# Altium PCB MB1642.PcbDoc
Units mm, origin at the board's own origin, x right, y up, seen from the top; angles counter-clockwise.
Board outline 70.36 x 75.18 mm, 2 copper layers (Top Layer, Bottom Layer), stack 1.57 mm thick; 25 components, 22 nets, 229 pads, 124 vias.
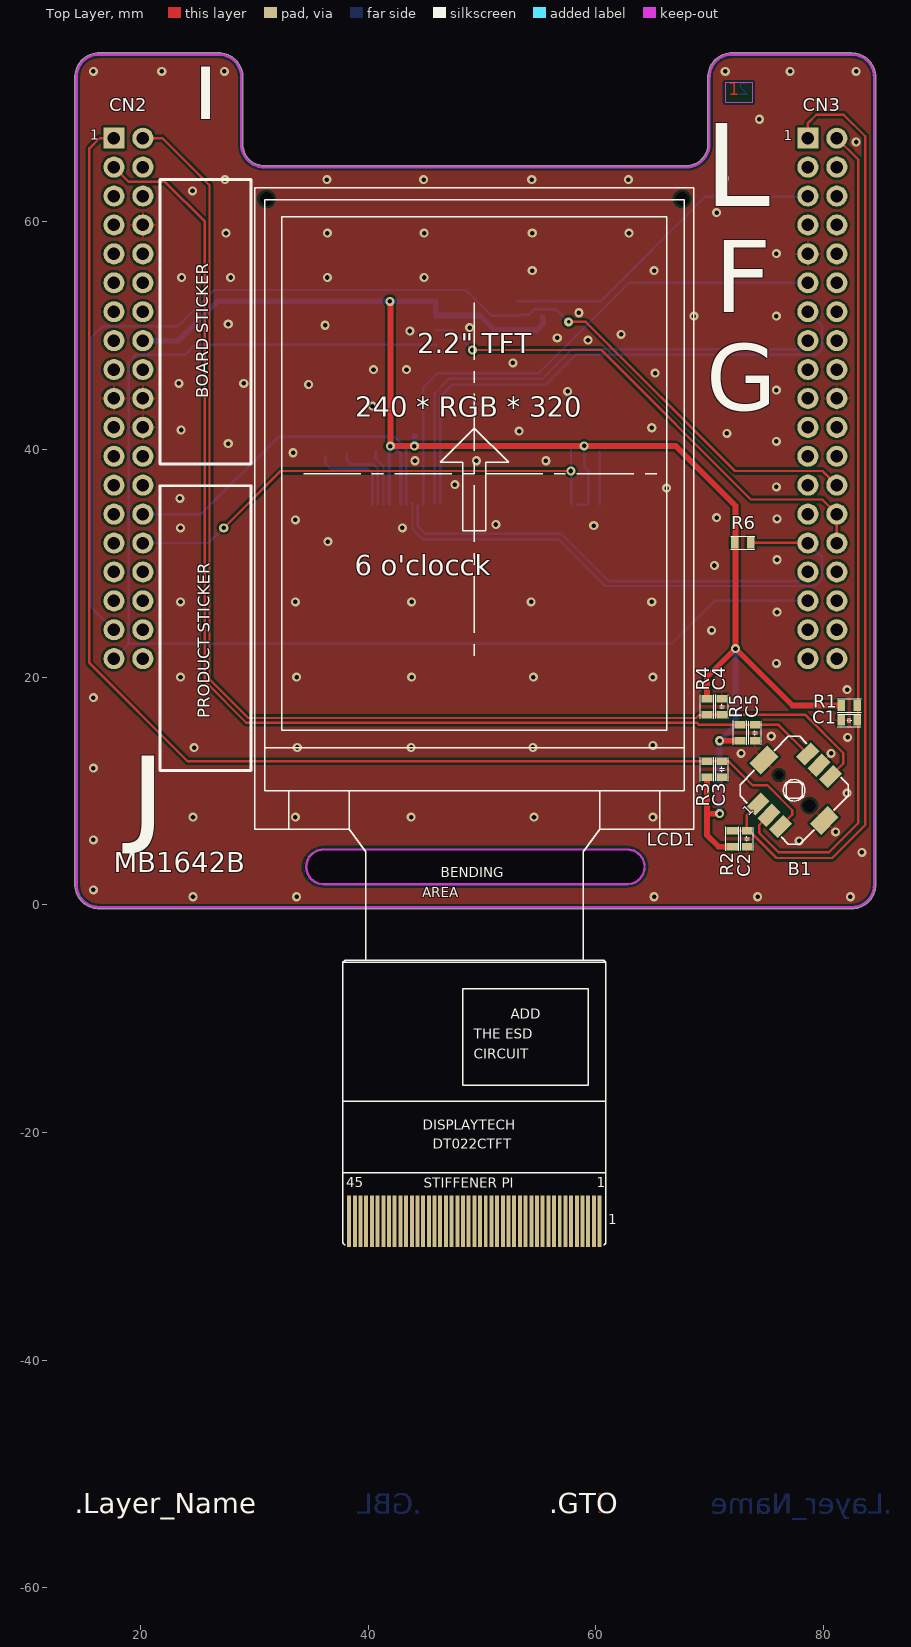
[diagram p0: Top Layer view]
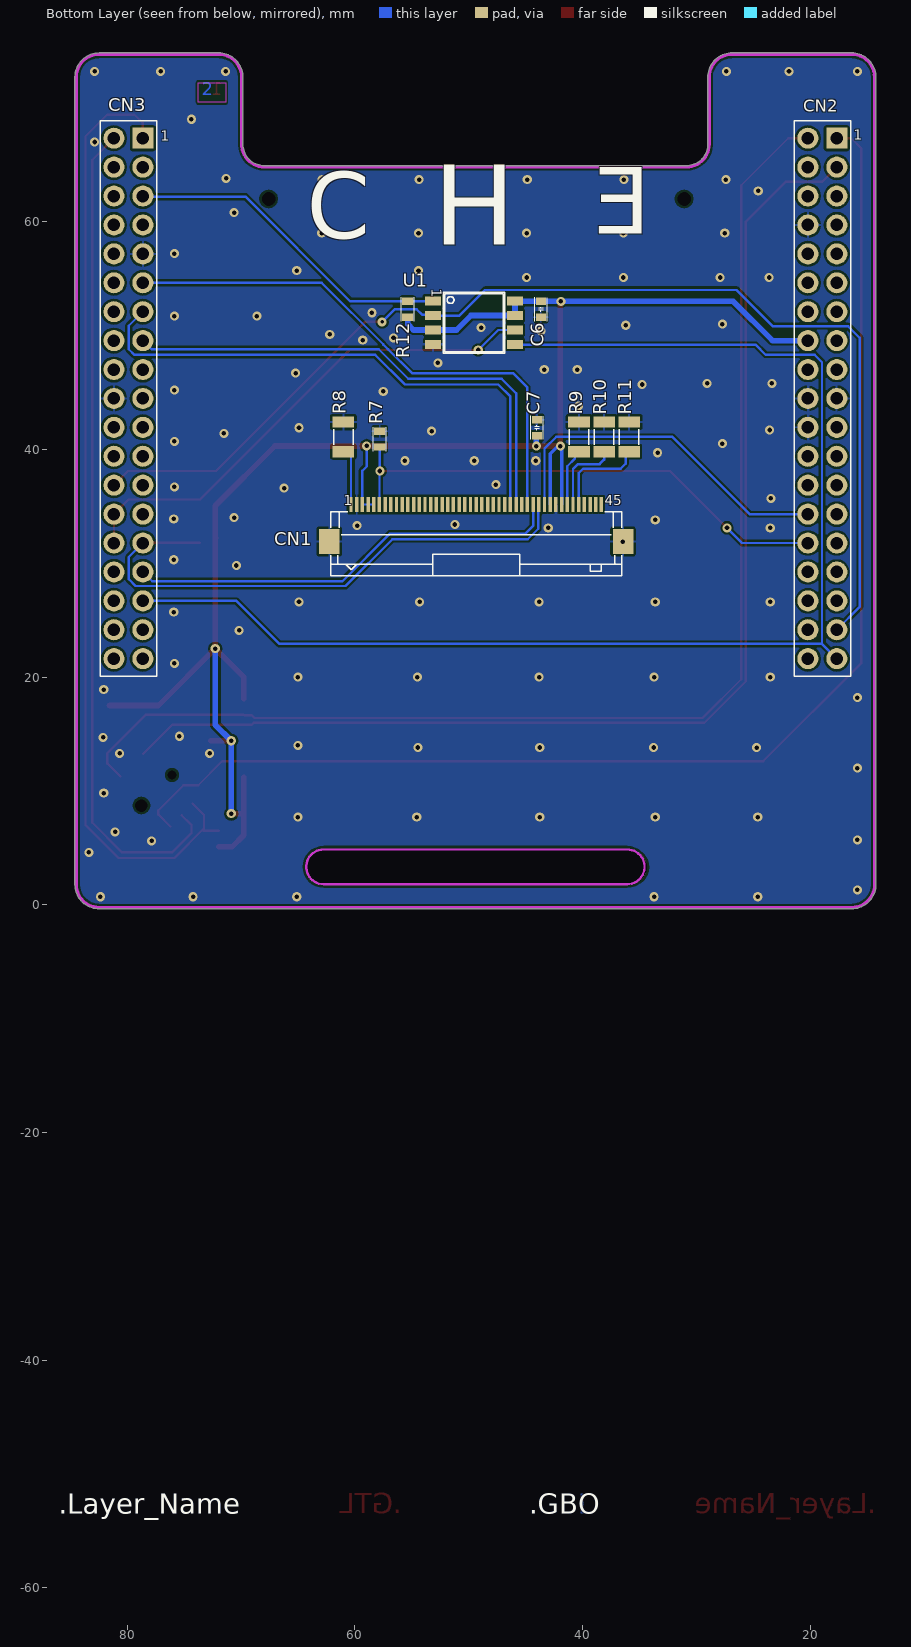
[diagram p1: Bottom Layer view, seen from below]
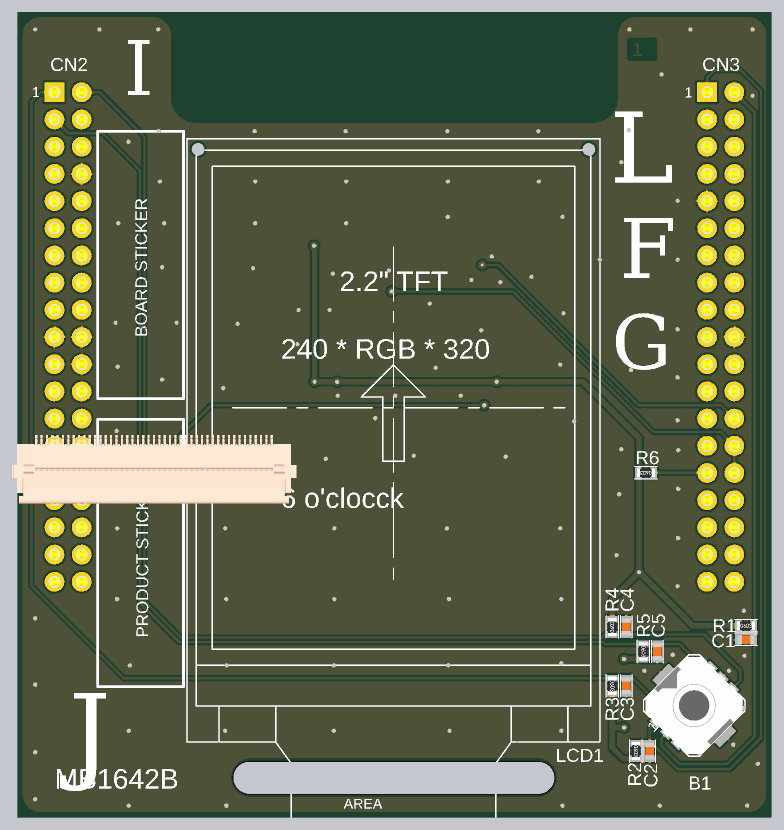
[diagram p2: 3D render of the assembled board from above, using the file's embedded part models]
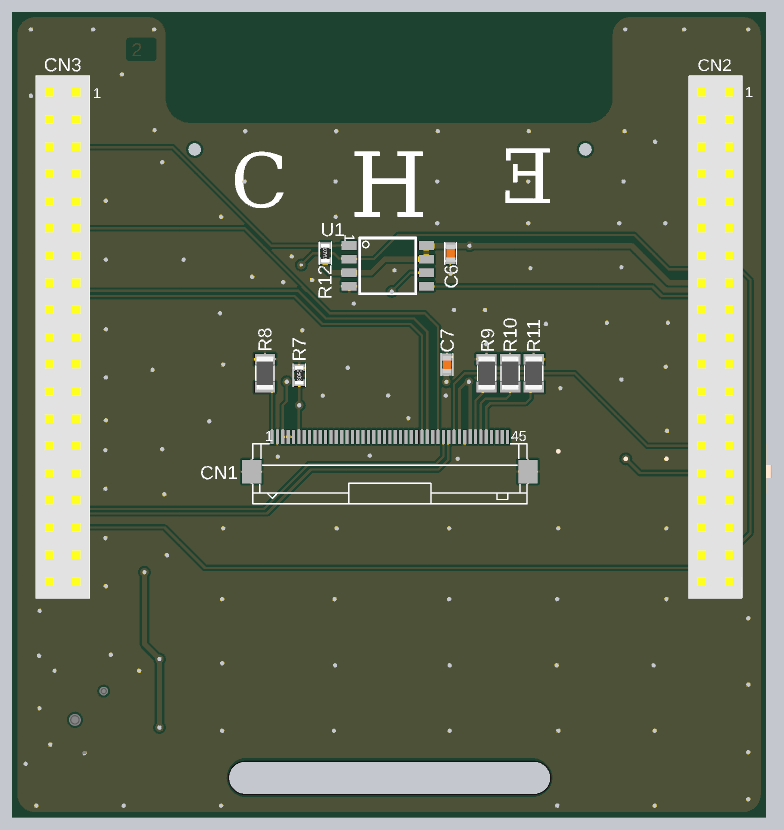
[diagram p3: 3D render of the assembled board from below, using the file's embedded part models]

## Layer stack, top to bottom
Top Solder: solder mask 0.015, Solder Resist, Dk 3.5
Top Layer: signal copper 0.035
Dielectric 1: core 1.5, FR-4, Dk 4.2
Bottom Layer: signal copper 0.035
Bottom Solder: solder mask 0.015, Solder Resist, Dk 3.5

## Board outline
14.226,1.77 ccw(c16.353,1.77) 16.353,-0.357 82.353,-0.357 ccw(c82.353,-0.23) 82.403,-0.347 ccw(c82.453,-0.23) 82.453,-0.357 ccw(c82.453,1.77) 84.58,1.77 ccw(c84.453,1.77) 84.571,1.818 ccw(c84.457,1.874) 84.584,1.874 84.584,72.696 ccw(c84.457,72.696) 84.58,72.728 ccw(c82.453,72.7) 82.453,74.827 71.953,74.827 ccw(c71.953,72.7) 69.826,72.7 69.826,66.8 cw(c67.953,66.8) 67.953,64.927 ccw(c67.953,64.8) 67.914,64.921 34.781,64.921 ccw(c34.743,64.8) 34.743,64.927 30.853,64.927 cw(c30.853,66.8) 28.98,66.8 28.98,72.7 cw(c28.853,72.7) 28.98,72.699 28.98,72.7 ccw(c26.853,72.7) 26.853,74.827 16.353,74.827 ccw(c16.353,72.7) 14.226,72.7

## Design rules (kind name [scope] priority, off if disabled: settings)
Clearance [All] p1: gap=0.2 ignorepadtopadclearanceinfootprint=FALSE except(0: Arc-Hole Track-Hole SMDPad-Hole THPad-Hole Via-Hole Fill-Hole Poly-Hole Region-Hole Text-Hole)
ComponentClearance [All] p1: gap=0.2 collisioncheckmode=3 verticalgap=0.2 showdistances=FALSE
HoleSize [All] p1: absolutevalues=TRUE maxlimit=10 minlimit=0.025 maxpercent=80.000 minpercent=20.000
MinimumSolderMaskSliver [All] p1: minsoldermaskwidth=0.1
PlaneConnect [All] p1: planeconnectstyle=Relief reliefexpansion=0.508 reliefentries=4 reliefconductorwidth=0.21 reliefairgap=0.21
PolygonConnect PolygonConnect_via [IsVia] p1: connectstyle=Direct reliefconductorwidth=0.254 reliefentries=4 polygonreliefangle="90 Angle" airgapwidth=0.254
PolygonConnect [All] p2: connectstyle=Relief reliefconductorwidth=0.2 reliefentries=4 polygonreliefangle="90 Angle" airgapwidth=0.2
RoutingVias [All] p1: holewidth=0.3 width=0.8 viastyle="Through Hole" minholewidth=0.3 minwidth=0.8 maxholewidth=0.3 maxwidth=0.8
SilkToSilkClearance [All] p1: silktosilkclearance=0.2
SilkToSolderMaskClearance [IsPad] p1: minsilkscreentomaskgap=0.2 clearancetoexposedcopper=TRUE
SolderMaskExpansion [All] p1: expansion=0.102 istentingtop=FALSE
Width [All] p1: maxlimit=1 minlimit=0.2 preferedwidth=0.2 minimp=50.000000 maximp=50.000000 favimp=50.000000
24 further rules are at their usual default settings.

## Components (designator, comment, footprint, x,y, rotation, side; value= is the part's Value field where it differs from the comment)
B1 "Joystick MT-008A_M" SWI_XIEJIA_MT-008A_6P 77.405,10.057 r45 top value=MT-008A
C1 "Capacitor" C0603 82.253,16.2 r0 top value=10nF
C2 "Capacitor" C0603 73.253,5.8 r90 top value=10nF
C3 "Capacitor" C0603 71.053,11.9 r90 top value=10nF
C4 "Capacitor" C0603 71.053,17.4 r270 top value=10nF
C5 "Capacitor" C0603 73.953,15.1 r90 top value=10nF
C6 "Capacitor" C0603 43.653,52.3 r270 bottom value=100nF
C7 "Capacitor" C0603 44,41.9 r270 bottom value=100nF
CN1 "FH12-45S-0.5SH(55)" CON_HRS_FH12-45S-05SH 49.332,35.155 r180 bottom
CN2 "Socket 19x2" CON_SAMTEC_SSW-119-01-X-D 18.925,44.474 r90 bottom
CN3 "Socket 19x2" CON_SAMTEC_SSW-119-01-X-D 79.885,44.474 r90 bottom locked
LCD1 "DT022CTFT" LCD_DISPLAYTECH_DT022CTFT_45P_P050 49.316,37.87 r0 top locked
R1 "Resistor" R0603 82.253,17.5 r0 top value=10K
R2 "Resistor" R0603 71.953,5.8 r270 top value=10K
R3 "Resistor" R0603 69.753,11.9 r270 top value=10K
R4 "Resistor" R0603 69.753,17.4 r90 top value=10K
R5 "Resistor" R0603 72.653,15.1 r270 top value=10K
R6 "Resistor" R0603 72.9,31.8 r180 top value=10K
R7 "Resistor" R0603 57.8,40.9 r270 bottom value=10K
R8 "Resistor" R1206_H0P55 61,41.1 r270 bottom value=6.2R
R9 "Resistor" R1206_H0P55 40.3,41.1 r270 bottom value=6.2R
R10 "Resistor" R1206_H0P55 38.1,41.1 r270 bottom value=6.2R
R11 "Resistor" R1206_H0P55 35.9,41.1 r270 bottom value=6.2R
R12 "Resistor" R0603 55.353,52.3 r90 bottom value=10K
U1 "MX25L6433FM2I-08G" ICC_SOP8_5P23X5P28_P127 49.532,51.117 r270 bottom

## Footprints (in the part's own frame and the unit in brackets; to place one, negate y for a bottom-side part, rotate by r counter-clockwise, add the part's x,y. Pads: shape width x height; smd on the part's side, far side on the other; paste and mask are expansions set on the pad)
C0603 [mm]
  rect 0.64x0.89 smd mask+0.05: 1(-0.7,0) 2(0.7,0)
  silkscreen extent -1.05,-0.55 1.02,0.55, body extent -0.9,-0.5 0.9,0.5, height 1.4
CON_HRS_FH12-45S-05SH [mm] "MCD-01980"
  rect 0.3x1.3 smd mask+0.05: 1(-11,0) 2(-10.5,0) 3(-10,0) 4(-9.5,0) 5(-9,0) 6(-8.5,0) 7(-8,0) 8(-7.5,0) 9(-7,0) 10(-6.5,0) 11(-6,0) 12(-5.5,0) 13(-5,0) 14(-4.5,0) 15(-4,0) 16(-3.5,0) 17(-3,0) 18(-2.5,0) 19(-2,0) 20(-1.5,0) 21(-1,0) 22(-0.5,0) 23(0,0) 24(0.5,0) 25(1,0) 26(1.5,0) 27(2,0) 28(2.5,0) 29(3,0) 30(3.5,0) 31(4,0) 32(4.5,0) 33(5,0) 34(5.5,0) 35(6,0) 36(6.5,0) 37(7,0) 38(7.5,0) 39(8,0) 40(8.5,0) 41(9,0) 42(9.5,0) 43(10,0) 44(10.5,0) 45(11,0)
  rect 1.8x2.2 smd mask+0.05: MT1(12.9,-3.25) MT2(-12.9,-3.25)
  silkscreen extent -12.8,-6.25 12.8,-0.65, body extent -13.3,-6.25 13.3,0.15, height 4.8
CON_SAMTEC_SSW-119-01-X-D [mm] "MCD-01845"
  rect 1.85x1.85 / inner round 1.85 / far side rect 1.85x1.85 hole 1.1 mask+0.05: 1(22.86,-1.27)
  round 1.85 hole 1.1 mask+0.05: 2(22.86,1.27) 3(20.32,-1.27) 4(20.32,1.27) 5(17.78,-1.27) 6(17.78,1.27) 7(15.24,-1.27) 8(15.24,1.27) 9(12.7,-1.27) 10(12.7,1.27) 11(10.16,-1.27) 12(10.16,1.27) 13(7.62,-1.27) 14(7.62,1.27) 15(5.08,-1.27) 16(5.08,1.27) 17(2.54,-1.27) 18(2.54,1.27) 19(0,-1.27) 20(0,1.27) 21(-2.54,-1.27) 22(-2.54,1.27) 23(-5.08,-1.27) 24(-5.08,1.27) 25(-7.62,-1.27) 26(-7.62,1.27) 27(-10.16,-1.27) 28(-10.16,1.27) 29(-12.7,-1.27) 30(-12.7,1.27) 31(-15.24,-1.27) 32(-15.24,1.27) 33(-17.78,-1.27) 34(-17.78,1.27) 35(-20.32,-1.27) 36(-20.32,1.27) 37(-22.86,-1.27) 38(-22.86,1.27)
  silkscreen extent -24.39,-2.47 24.39,2.47, body extent -24.38,-2.48 24.39,2.48, height 8.51
ICC_SOP8_5P23X5P28_P127 [mm] "MCD-01740"
  rect 0.8x1.4 smd mask+0.05: 1(-1.905,-3.6) 2(-0.635,-3.6) 3(0.635,-3.6) 4(1.905,-3.6) 5(1.905,3.6) 6(0.635,3.6) 7(-0.635,3.6) 8(-1.905,3.6)
  silkscreen extent -2.67,-2.69 2.67,2.69, body extent -2.67,-4.05 2.67,4.05, height 2.17
LCD_DISPLAYTECH_DT022CTFT_45P_P050 [mm] "MCD-01982"
  rect 0.35x4.5 smd mask+0.038: 1(11,-65.68) 2(10.5,-65.68) 3(10,-65.68) 4(9.5,-65.68) 5(9,-65.68) 6(8.5,-65.68) 7(8,-65.68) 8(7.5,-65.68) 9(7,-65.68) 10(6.5,-65.68) 11(6,-65.68) 12(5.5,-65.68) 13(5,-65.68) 14(4.5,-65.68) 15(4,-65.68) 16(3.5,-65.68) 17(3,-65.68) 18(2.5,-65.68) 19(2,-65.68) 20(1.5,-65.68) 21(1,-65.68) 22(0.5,-65.68) 23(0,-65.68) 24(-0.5,-65.68) 25(-1,-65.68) 26(-1.5,-65.68) 27(-2,-65.68) 28(-2.5,-65.68) 29(-3,-65.68) 30(-3.5,-65.68) 31(-4,-65.68) 32(-4.5,-65.68) 33(-5,-65.68) 34(-5.5,-65.68) 35(-6,-65.68) 36(-6.5,-65.68) 37(-7,-65.68) 38(-7.5,-65.68) 39(-8,-65.68) 40(-8.5,-65.68) 41(-9,-65.68) 42(-9.5,-65.68) 43(-10,-65.68) 44(-10.5,-65.68) 45(-11,-65.68)
  round 0 hole 1.2 unplated mask+0.05: NPTH1(-18.25,24.13) NPTH2(18.25,24.13)
  silkscreen extent -19.29,-67.73 19.29,25.13, body extent -19.29,-67.73 19.29,25.13, height 2.5
R0603 [mm]
  rect 0.64x1 smd mask+0.05: 1(-0.7,0) 2(0.7,0)
  silkscreen extent -1.05,-0.58 1.05,0.58, body extent -0.9,-0.5 0.9,0.5, height 0.56
R1206_H0P55 [mm]
  rect 1x1.9 smd mask+0.05: 1(-1.3,0) 2(1.3,0)
  silkscreen extent -0.67,-0.85 0.67,0.85, body extent -1.6,-0.85 1.6,0.85, height 0.65
SWI_XIEJIA_MT-008A_6P [mm] "MCD-00132"
  rect 1.8x1.1 smd mask+0.05: 1(-3.1,1.4) 2(-3.1,0) 3(-3.1,-1.4) 4(3.1,1.4) 5(3.1,0) 6(3.1,-1.4)
  rect 2.2x1.4 smd mask+0.05: 7(0,3.75) 8(0,-3.75)
  round 0 hole 0.8 unplated paste-10 mask+0.05: NPTH1(0,1.9)
  round 0 hole 1.1 unplated paste-10 mask+0.05: NPTH2(0,-1.9)
  silkscreen extent -3.7,-3.7 3.7,3.7, body extent -3.85,-3.75 3.85,3.75, height 5.2

## Part data
B1: library part MCD-00132, "Joystick, 4 dir, 1 OK", Manufacturer="XIEJIA ELECTRONICS", Manufacturer_Part_Number=MT-008A, BMS_Part_Number=9180124, ComponentLink1Description=Datasheet, ComponentLink1URL="http://tunmcdsvn.tun.st.com/Component_Datasheet_Library/Trunk/Misc/Xieja electronics_MT-008A", ECCN_EU=n/a, ECCN_US=n/a, Internal_Part_Number=MCD-00132, Part_Type=Misc, Provided_By=SUBCO, Status=Released
C1 C2 C3 C4 C5: library part MCD-01098, "Capacitor,10nF,100V,X7R,10%,0603", Alternate_Manufacturer=N/A, Manufacturer=YAGEO, Manufacturer_Part_Number=CC0603KRX7R0BB103, Package=C0603, Alternate_Manufacturer_Part_Number=N/A, BMS_Part_Number=N/A, ComponentLink1Description=Datasheet, ComponentLink1URL=http://tunmcdsvn.tun.st.com/Component_Datasheet_Library/Trunk/Capacitors/Yageo_Multilayer_Capacitor_NPO_X7R_100V_to_630V_0.47pF%20to%202.2uF/Yageo_Multilayer_Capacitor_NPO_X7R_100V_to_630V_0.47pF%20to%202.2uF.pdf, ECCN_EU=NEC, ECCN_US=EAR99, Internal_Part_Number=MCD-01098, Order_Code_Digikey=311-1788-1-ND, Order_Code_Farnell=1284119, Order_Code_RS=N/A, Part_Type=Capacitor, Provided_By=SUBCO, Status=Checked
C6 C7: library part MCD-00237, "Capacitor, MLCC, 100nF, 6V3, X5R, 10%, 0603, T=0,8mm", Manufacturer=YAGEO, Manufacturer_Part_Number=CC0603KRX5R5BB104, Package=C0603, ComponentLink1Description=Datasheet, ComponentLink1URL=http://tunmcdsvn.tun.st.com/Component_Datasheet_Library/Trunk/Capacitors/Yageo_Multilayer_capacitor_X5R_series_100pF_to_100uF, ECCN_EU=NEC, ECCN_US=EAR99, Internal_Part_Number=MCD-00237, Part_Type=Capacitor, Provided_By=SUBCO, Status=Released
CN1: library part MCD-01980, "45 pins P 0.5 surface mount connector", Alternate_Manufacturer=N/A, Manufacturer=HIROSE, Alternate_Manufacturer_Part_Number=N/A, BMS_Part_Number=N/A, ComponentLink1Description=Datasheet, ComponentLink1URL=http://tunmcdsvn.tun.st.com/Component_Datasheet_Library/Trunk/Connectors/Hirose_FH12-45S-05SH/Hirose_FH12-45S-0.5SH(55).pdf, ECCN_EU=NEC, ECCN_US=EAR99, Internal_Part_Number=MCD-01980, Manufacturer_Part_Number=FH12-45S-0.5SH(55), Order_Code_Digikey=HFJ145CT-ND, Order_Code_Farnell=2427723, Order_Code_RS=772-7027, Part_Type=Connector, Provided_By=SUBCO, Status=Checked
CN2 CN3: library part MCD-01845, "Socket, 19x2, 2.54mm, VR, TH, Height 8.51mm/2.64mm", Manufacturer=SAMTEC, Manufacturer_Part_Number=SSW-119-01-x-D, ComponentLink1Description=Datasheet, ComponentLink1URL=http://tunmcdsvn.tun.st.com/Component_Datasheet_Library/Trunk/Connectors/Samtec_SSW-SSQ-series, ECCN_EU=n/a, ECCN_US=n/a, Internal_Part_Number=MCD-01845, Part_Type=Connector, Provided_By=SUBCO, Status=Checked
LCD1: library part MCD-01982, "240x320 2.2inch display", Manufacturer=DISPLAYTECH, ComponentLink1Description=Datasheet, ComponentLink1URL=http://tunmcdsvn.tun.st.com/Component_Datasheet_Library/Trunk/Display/Displaytech_LCD_DT022CTFT/DisplayTech_2.2_240x320.pdf, ECCN_EU=NEC, ECCN_US=EAR99, Internal_Part_Number=MCD-01982, Manufacturer_Part_Number=DT022CTFT, Order_Code_RS=182-5796, Part_Type=Display, Provided_By=SUBCO, Status=Checked
R1 R2 R3 R4 R5 R6 R7 R12: library part MCD-00220, "Resistor,10K,0603,1%,1/10W", Manufacturer=YAGEO, Manufacturer_Part_Number=RC0603FR-0710KL, Package=R0603, ComponentLink1Description=Datasheet, ComponentLink1URL=http://tunmcdsvn.tun.st.com/Component_Datasheet_Library/Trunk/Resistors/Yageo_Resistor_RC0603-series, ECCN_EU=NEC, ECCN_US=EAR99, Internal_Part_Number=MCD-00220, Part_Type=Resistor, Provided_By=SUBCO, Status=Released
R8 R9 R10 R11: library part MCD-02101, "Resistor,6.2R,1206,1%,0.5W", Alternate_Manufacturer=N/A, Manufacturer=PANASONIC, Manufacturer_Part_Number=ERJ8BQF6R2V, Package=1206, Alternate_Manufacturer_Part_Number=N/A, BMS_Part_Number=N/A, ComponentLink1Description=Datasheet, ComponentLink1URL=http://tunmcdsvn.tun.st.com/Component_Datasheet_Library/Trunk/Resistors/PANASONIC_Resistor_6.2R_1%_ERJ8BQF6R2V/, ECCN_EU=NEC, ECCN_US=EAR99, Internal_Part_Number=MCD-02101, Order_Code_Digikey=P17619CT-ND, Order_Code_Farnell=1892997, Order_Code_RS=721-6019, Part_Type=Resistor, Provided_By=SUBCO, Status=Checked
U1: library part MCD-01981, Alternate_Manufacturer=N/A, Manufacturer=MACRONIX, Package="SOP8 200", Alternate_Manufacturer_Part_Number=N/A, BMS_Part_Number=N/A, ComponentLink1Description=Datasheet, ComponentLink1URL=http://tunmcdsvn.tun.st.com/Component_Datasheet_Library/Trunk/IC/Macronix_NOR_QSPI_MX25L6433F/, ECCN_EU=NEC, ECCN_US=3A991.B.1.A, Internal_Part_Number=MCD-01981, Manufacturer_Part_Number=MX25L6433FM2I-08G, Order_Code_Digikey=MX25L6433FM2I-08G-ND, Order_Code_Farnell=3129181, Order_Code_RS=170-3096, Part_Type=IC, Provided_By=SUBCO, Status=Checked

## Free pads (board coordinates)
  round 0.508 on Mech16: 1(25.868,-60.392) 1(74.715,-60.392)
  oval 30x3 hole 3 slot 30 at 0 deg unplated: ""(49.353,3.3)

## Via types
v1: diameter 0.8, hole 0.4, Top Layer to Bottom Layer, tented both sides, 123 vias
v2: diameter 0.8, hole 0.3, Top Layer to Bottom Layer, tented both sides, 1 vias

## Nets (pads, with @x,y where several pads share a name; then routed paths per layer and width w, separated by ;. In a path a pad name is that pad's centre, name@x,y a point inside that pad or via, vN(x,y) a via of type N, cw(c..) or ccw(c..) an arc to the next point about the centre after c; other vN are vias at no path point)
3V3: C6.1 C7.2 CN1.3 CN1.4 CN1.5 CN1.36 CN1.38 CN2.16 R1.1 R2.2 R3.2 R4.2 R5.2 R6.2 R12.1 U1.3 U1.7 U1.8 | length 157.5
  Top Layer w0.5: v1(41.943,40.29) v1(44.053,40.29) 67.01,40.29 72.253,35.047 R6.2@72.253,32.2 ; v1@41.943,40.345 v1@41.943,53 ; R3.2 69.753,8 ; R4.2 69.753,20 v1(72.253,22.5) ; v1(70.853,8) 69.753,8 ; v1(70.853,14.4) R5.2 ; R2.2 70.753,5.1 69.753,6.1 69.753,8 ; R6.2@72.242,32.19 R6.2@72.253,32.2 ; R1.1 77.253,17.5 v1(72.253,22.5) ; v1(72.253,22.5) R6.2@72.253,32.2
  Bottom Layer w0.21: CN1.5 CN1.4 58.853,35.155 CN1.3 59.332,38.121 58.953,38.5 v1(58.953,40.3)
  Bottom Layer w0.3: CN1.38 41.832,40.179 v1(41.943,40.29) 42.053,40.4 42.832,39.621 CN1.36
  Bottom Layer w0.5: CN2.16 23.299,49.554 26.745,53 U1.8@45.932,53 ; v1(44.053,40.29) C7.2@44.053,41.2 ; U1.8 U1.7 49.801,51.752 51.071,50.482 U1.3 54.835,50.482 55.353,51 R12.1 ; v1(70.853,8) v1(70.853,14.4) 72.253,15.8 v1(72.253,22.5)
  other v1: 41.9,53
DISP_NRESET_PA1: CN1.6 CN2.30 R7.2 | length 45.3
  Top Layer w0.21: v1(27.3,33.1) 32.3,38.1 v1(57.8,38.1)
  Bottom Layer w0.21: CN2.30 25.974,31.774 v1(27.3,33.1) ; CN1.6 57.832,38.068 v1(57.8,38.1) 57.8,40.147 R7.2@57.853,40.2
DISP_TE_PA0: CN1.35 CN2.28 | length 31.3
  Bottom Layer w0.21: CN2.28 25.311,34.314 32.097,41.1 35.393,41.1 42.3,41.1 43.326,40.074 ; CN1.35 43.332,40.1
GND: B1.5 B1.7 B1.8 C1.1 C2.1 C3.1 C4.1 C5.1 C6.2 C7.1 CN1.2 CN1.37 CN1.MT1 CN1.MT2 CN2.8 CN2.19 CN2.20 CN2.22 CN3.9 CN3.20 R7.1 R8.1 R9.1 R10.1 R11.1 U1.4
  other v1: 24.6,0.7 33.7,0.7 65.1,0.7 74.2,0.7 82.353,0.7 15.853,1.3 83.353,4.6 77.848,5.6 15.853,5.7 81.053,6.4 24.6,7.7 33.6,7.7 43.753,7.7 54.553,7.7 65,7.7 82.053,9.8 15.853,12 72.753,13.3 80.653,13.3 24.7,13.8 33.753,13.81 43.753,13.81 54.453,13.81 65,14 82.1,14.7 75.4,14.8 15.853,18.2 82.053,18.9 23.5,20 33.7,20 43.8,20 54.5,20 65,20 75.853,21.2 70.153,24.1 75.9,25.7 23.5,26.6 33.6,26.6 43.8,26.6 54.3,26.6 64.9,26.6 70.4,29.8 75.9,30.3 36.453,31.9 23.5,33.1 43,33.1 59.8,33.3 51.2,33.4 33.6,33.8 75.9,33.9 70.6,34 23.453,35.7 66.2,36.6 75.853,36.7 47.6,36.9 44.1,39 49.5,39 55.6,39 33.4,39.7 27.7,40.5 75.853,40.7 71.5,41.4 53.253,41.6 23.553,41.7 64.9,41.9 40.353,43.8 57.5,45.1 75.853,45.2 34.753,45.7 23.353,45.8 29.053,45.8 65.2,46.7 40.453,47 43.353,47 52.7,47.6 59.3,49.6 56.6,49.8 62.2,50.1 43.653,50.4 48.9,50.7 36.2,50.9 27.7,51 68.6,51.7 75.853,51.7 58.5,52 23.6,55.1 27.9,55.1 36.4,55.1 44.9,55.1 54.4,55.7 65.1,55.7 75.853,57.2 27.5,59 36.4,59 44.9,59 54.4,59 62.9,59 70.6,60.8 24.553,62.7 27.4,63.7 36.353,63.7 44.853,63.7 54.353,63.7 62.853,63.7 71.3,63.8 82.853,67 74.353,69 15.853,73.2 21.853,73.2 27.353,73.2 71.353,73.2 77.053,73.2 82.853,73.2
KEY_CENTER_PC8: B1.2 C1.2 CN3.2 R1.2 | length 73.3
  Top Layer w0.21: B1.2 74.348,7 74.348,6.3 76.048,4.6 80.453,4.6 83.053,7.2 83.053,16.2 83.053,17.5 83.053,65.436 CN3.2
KEY_DOWN_PC10: B1.3 C3.2 CN2.1 R3.1 | length 116.7
  Top Layer w0.21: CN2.1 16.387,67.334 15.496,66.443 15.496,21.233 24.129,12.6 C3.2 71.653,12.6 73.753,10.5 75.053,10.5 77.248,8.305 77.248,7.92 B1.3
KEY_LEFT_PC9: B1.1 C2.2 CN3.1 R2.1 | length 84.5
  Top Layer w0.21: R2.1 C2.2 ; B1.1 73.248,7.88 73.248,6.7 73.35,6.597 75.848,4.1 80.753,4.1 83.653,7 83.653,67.5 81.753,69.4 79.353,69.4 78.615,68.662 CN3.1
KEY_RIGHT_PC11: B1.6 C4.2 CN2.2 R4.1 | length 112.1
  Top Layer w0.21: CN2.2 21.919,67.334 26.053,63.2 26.053,19.8 29.453,16.4 68.803,16.4 69.061,16.658 69.711,16.658 R4.1 C4.2 78.353,16.7 81.728,13.325 81.728,12.4 B1.6
KEY_UP_PC12: B1.4 C5.2 CN2.3 R5.1 | length 106
  Top Layer w0.21: CN2.3 18.949,63.5 22.153,63.5 25.643,60.01 25.643,19.63 29.283,15.99 68.863,15.99 69.053,15.8 C5.2 76.046,15.8 B1.4
NetCN1_1: CN1.1 R8.2 | length 4.7
  Bottom Layer w0.21: CN1.1 60.332,39.779 R8.2@60.353,39.8
NetCN1_39: CN1.39 R9.2 | length 5
  Bottom Layer w0.21: R9.2@40.653,39.825 40.653,39.2 41.332,38.521 CN1.39
NetCN1_40: CN1.40 R10.2 | length 6.7
  Bottom Layer w0.21: R10.2@38.1,39.6 38.1,39.1 38.49,38.71 40.39,38.71 40.832,38.268 CN1.40
NetCN1_41: CN1.41 R11.2 | length 7.9
  Bottom Layer w0.21: R11.2@36.2,39.4 36.2,38.75 36.65,38.3 39.953,38.3 40.302,37.951 40.332,37.921 CN1.41
SPIA_DCX_PB3_PB3: CN1.33 CN3.31 | length 38.5
  Bottom Layer w0.21: CN1.33 44.332,33.268 45,32.6 56.9,32.6 61.09,28.41 61.853,28.41 77.791,28.41 CN3.31
SPIA_MISO_PA6_PB14: CN1.29 CN3.13 | length 48.4
  Bottom Layer w0.21: CN1.29@46.332,35.305 46.332,44.632 47.4,45.7 55.6,45.7 58.2,48.3 79.353,48.3 79.853,48.8 79.853,50.856 CN3.13
SPIA_MOSI_PA7_PB15: CN1.30 CN3.15 | length 44.3
  Bottom Layer w0.21: CN1.30@45.832,35.305 45.832,44.932 47.1,46.2 55.3,46.2 57.9,48.8 77.861,48.8 CN3.15
SPIA_NCS_PB5_PB5: CN1.34 CN3.29 R6.1 | length 49.3
  Top Layer w0.21: R6.1 78.589,31.8 CN3.29
  Bottom Layer w0.21: CN1.34@43.832,35.326 43.877,35.281 43.877,33.023 44.8,32.1 56.7,32.1 60.8,28 79.253,28 79.853,28.6 79.853,30.536 CN3.29
SPIA_SCK_PA5_PB13: CN1.32 CN3.11 | length 47.9
  Bottom Layer w0.21: CN1.32 44.832,45.432 46.1,46.7 54.977,46.7 57.072,48.795 57.092,48.795 57.505,49.208 57.505,49.228 62.911,54.634 CN3.11
SPIB_MISO_PC2_PA6: CN2.35 CN3.26 U1.2 | length 101.3
  Top Layer w0.21: v2(57.6,51.2) 59.1,51.2 72.2,38.1 79.909,38.1 CN3.26
  Bottom Layer w0.21: CN2.35 15.653,26.156 15.653,49.8 16.653,50.8 23.253,50.8 26.453,54 48.553,54 50.801,51.752 U1.2 53.191,51.811 54.064,51.811 54.553,52.3 56.5,52.3 v2(57.6,51.2)
SPIB_MOSI_PC3_PA12: CN2.37 CN3.33 U1.5 | length 115.5
  Bottom Layer w0.21: CN2.37 18.953,22.912 ; U1.5@45.982,49.2 25.453,49.2 24.8,49.2 23.9,48.3 19.6,48.3 18.953,47.653 18.953,42.7 18.953,22.912 ; CN3.33 70.4,26.694 66.618,22.912 18.953,22.912
SPIB_NCS_PB9_PB7: CN3.5 R12.2 U1.1 | length 29.4
  Bottom Layer w0.21: U1.1 54.431,53.022 54.453,53 R12.2 ; R12.2@55.453,53.1 R12.2 ; CN3.5@78.615,62.2 69.6,62.2 60.4,53 R12.2
SPIB_SCK_PB13_PA5: CN3.28 CN3.30 U1.6 | length 44.5
  Top Layer w0.21: v1(49.153,48.73) 60.47,48.73 73.6,35.6 79.869,35.6 CN3.28 CN3.30
  Bottom Layer w0.21: U1.6 47.401,50.482 v1(49.153,48.73)
pads on no net: B1.NPTH1 B1.NPTH2 CN1.7 CN1.8 CN1.9 CN1.10 CN1.11 CN1.12 CN1.13 CN1.14 CN1.15 CN1.16 CN1.17 CN1.18 CN1.19 CN1.20 CN1.21 CN1.22 CN1.23 CN1.24 CN1.25 CN1.26 CN1.27 CN1.28 CN1.31 CN1.42 CN1.43 CN1.44 CN1.45 CN2.4 CN2.5 CN2.6 CN2.7 CN2.9 CN2.10 CN2.11 CN2.12 CN2.13 CN2.14 CN2.15 CN2.17 CN2.18 CN2.21 CN2.23 CN2.24 CN2.25 CN2.26 CN2.27 CN2.29 CN2.31 CN2.32 CN2.33 CN2.34 CN2.36 CN2.38 CN3.3 CN3.4 CN3.6 CN3.7 CN3.8 CN3.10 CN3.12 CN3.14 CN3.16 CN3.17 CN3.18 CN3.19 CN3.21 CN3.22 CN3.23 CN3.24 CN3.25 CN3.27 CN3.32 CN3.34 CN3.35 CN3.36 CN3.37 CN3.38 LCD1.1 LCD1.2 LCD1.3 LCD1.4 LCD1.5 LCD1.6 LCD1.7 LCD1.8 LCD1.9 LCD1.10 LCD1.11 LCD1.12 LCD1.13 LCD1.14 LCD1.15 LCD1.16 LCD1.17 LCD1.18 LCD1.19 LCD1.20 LCD1.21 LCD1.22 LCD1.23 LCD1.24 LCD1.25 LCD1.26 LCD1.27 LCD1.28 LCD1.29 LCD1.30 LCD1.31 LCD1.32 LCD1.33 LCD1.34 LCD1.35 LCD1.36 LCD1.37 LCD1.38 LCD1.39 LCD1.40 LCD1.41 LCD1.42 LCD1.43 LCD1.44 LCD1.45 LCD1.NPTH1 LCD1.NPTH2

## Polygon pours and split planes (outlines as drawn)
GND on Bottom Layer "GND_L02_P001" (solid, remove dead copper, pour order 1): 13.904,75.335 14.158,75.589 85.024,75.589 85.024,-0.865 85.278,-1.119 84.643,-1.754 13.523,-1.754 13.523,75.208 13.904,75.589
GND on Top Layer "GND_L01_P000" (solid, remove dead copper, pour order 0): 13.904,75.462 14.158,75.716 85.024,75.716 85.024,-0.738 85.278,-0.992 84.643,-1.627 13.523,-1.627 13.523,75.335 13.904,75.716

## Keep-outs
Keep-Out Layer:
  rectangle: 71.353,70.475 73.753,72.225
  lines w0.21: 36.07,1.802 cw(c36.07,3.326) 36.07,4.85 62.74,4.85 cw(c62.74,3.326) 62.74,1.802 36.07,1.802
  lines w0.254: 14.353,72.696 14.353,1.77 ccw(c16.353,1.77) 16.353,-0.23 82.453,-0.23 ccw(c82.453,1.77) 84.453,1.77 ; 14.357,72.7 cw(c16.357,72.7) 16.357,74.7 26.853,74.7 ; 26.853,74.696 cw(c26.853,72.696) 28.853,72.696 ; 28.853,72.7 28.853,66.798 ccw(c30.853,66.798) 30.853,64.798 ; 30.857,64.794 67.943,64.794 ; 67.949,64.8 ccw(c67.949,66.8) 69.949,66.8 ; 69.953,66.804 69.953,72.696 ; 69.957,72.7 cw(c71.957,72.7) 71.957,74.7 74.297,74.7 82.449,74.7 ; 82.453,74.696 cw(c82.453,72.696) 84.453,72.696 ; 84.457,1.77 84.457,72.692

## Other copper
Top Layer:
  text "1" at 71.603,70.725 h2
  text ".Layer_Name" at 14.198,-54.044 h3
  text ".GTL" at 55.893,-54.044 h3
Bottom Layer:
  text "2" at 73.453,70.7 h2
  text ".GBL" at 44.689,-54.076 h3
  text ".Layer_Name" at 86.003,-54.076 h3

## Silkscreen, mask and mechanical layers (free items; w line width, h text height)
Top Overlay:
  lines w0.254: 21.7,11.8 29.7,11.8 29.7,36.8 21.7,36.8 21.7,11.8 ; 21.7,38.7 21.7,63.7 29.7,63.7 29.7,38.7 21.7,38.7
  text "CN2" at 17.253,69.322 h2
  text "CN3" at 78.153,69.322 h2
  text "I" at 26.9,67.1 h10
  text "1" at 15.553,66.9 h1.5
  text "1" at 76.504,66.863 h1.5
  text "L" at 69.5,58.9 h13
  text "F" at 70.4,50 h11
  text "BOARD STICKER" at 26.3,44.5 h1.8 r90
  text "G" at 69.7,41.5 h10
  text "PRODUCT STICKER" at 26.4,16.4 h1.8 r90
  text "J" at 19,4.1 h14
  text "MB1642B" at 17.653,2.3 h3
  text ".Layer_Name" at 14.198,-54.044 h3
  text ".GTO" at 55.893,-54.044 h3
Bottom Overlay:
  text "E" at 34,57 h10
  text "C" at 64.2,56.6 h10
  text "H" at 53.1,55.7 h12
  text ".GBO" at 44.689,-54.076 h3
  text ".Layer_Name" at 86.003,-54.076 h3
Top Paste:
  text ".Layer_Name" at 14.198,-54.044 h3
  text ".GTP" at 55.893,-54.044 h3
Bottom Paste:
  text ".GBP" at 44.689,-54.076 h3
  text ".Layer_Name" at 86.003,-54.076 h3
Top Solder:
  text ".Layer_Name" at 14.198,-54.044 h3
  text ".GTS" at 55.893,-54.044 h3
Bottom Solder:
  text ".GBS" at 44.689,-54.076 h3
  text ".Layer_Name" at 86.003,-54.076 h3
M1-Board Shape:
  lines w0.254: 32.795,64.794 67.953,64.794 ; 34.737,64.794 34.743,64.8 30.853,64.8 cw(c30.853,66.8) 28.853,66.8 28.853,71.155 28.853,72.7 ccw(c26.853,72.7) 26.853,74.7 24.353,74.7 16.353,74.7 ccw(c16.353,72.7) 14.353,72.7 14.353,1.77 ccw(c16.353,1.77) 16.353,-0.23 82.353,-0.23 ; 67.953,64.8 ccw(c67.953,66.8) 69.953,66.8 69.953,72.7 cw(c71.953,72.7) 71.953,74.7 74.353,74.7 82.453,74.7 cw(c82.453,72.7) 84.453,72.7 ; 82.453,-0.23 ccw(c82.453,1.77) 84.453,1.77 ; 84.457,1.874 84.457,72.696 ; 36.07,1.826 cw(c36.07,3.326) 36.07,4.826 62.74,4.826 cw(c62.74,3.326) 62.74,1.826 36.07,1.826
M2-Board Dimensions:
  text ".Layer_Name" at 14.198,-54.044 h3
  text ".GM2" at 55.893,-54.044 h3
M14-Top Assembly:
  text ".Layer_Name" at 14.198,-54.044 h3
  text ".GM14" at 55.893,-54.044 h3
M15-Bottom Assembly:
  text ".GM15" at 44.689,-54.076 h3
  text ".Layer_Name" at 86.003,-54.076 h3
Drill Drawing:
  drawing of 309 lines, arcs and shapes, not listed
  text "PCB SPECIFICATIONS :" at 15.704,125.388 h3
  text "PCB : TYPE 3" at 163.196,125.216 h3
  text "A.   MATERIAL :" at 15.704,121.388 h3
  text "FR-4" at 54.204,121.388 h3
  text "TG-170" at 70.704,121.388 h3
  text "X  TG-150" at 88.954,121.388 h3
  text "TG-140" at 104.954,121.388 h3
  text "ASPECT-RATIO, AXE Z :" at 163.196,119.716 h3
  text "B.   MATERIAL FAMILY :" at 15.704,118.388 h3
  text "N/A" at 54.204,118.388 h3
  text "C.   SOLDERMASK COLOR :" at 15.704,115.388 h3
  text "GREEN" at 54.204,115.388 h3
  text "WHITE" at 70.704,115.388 h3
  text "RED" at 88.954,115.388 h3
  text "BLACK" at 104.954,115.388 h3
  text "X  Blue ink PANTONE 2955" at 121.703,115.35 h3
  text "6:1 to 8:1 / LEVEL \"B\"" at 163.215,112.969 h3
  text "D.   SILKSCREEN COLOR :" at 15.704,112.388 h3
  text "X  WHITE" at 54.204,112.388 h3
  text "YELLOW" at 70.704,112.388 h3
  text "BLACK" at 88.954,112.388 h3
  text "Blue ink PANTONE 2955" at 104.954,112.388 h3
  text "E.   SURFACE FINISH :" at 15.704,109.388 h3
  text "X  ENIG" at 54.204,109.388 h3
  text "IMMERSION SILVER" at 70.704,109.388 h3
  text "IMMERSION TIN" at 104.954,109.388 h3
  text "MINIMUM PARAMETERS" at 163.242,107.368 h3
  text "HASL" at 54.204,106.388 h3
  text "HASL (PB-FREE)" at 70.704,106.388 h3
  text "GOLDEN FINGER" at 104.954,106.388 h3
  text "F.   IMPEDANCE CONTROL :" at 15.704,103.388 h3
  text "X   NO" at 54.204,103.388 h3
  text "YES  (SEE IMPEDANCE TABLE FOR DETAIL INFORMATION)" at 70.704,103.388 h3
  text "DEFAULT" at 163.242,101.868 h3
  text "G.   THROUGH VIA :" at 15.704,100.388 h3
  text "PLUG THE VIAS WHICH ARE COVERED WITH SOLDERMASK ONE OR TWO SIDE." at 54.204,100.388 h3
  text "PLUG MATERIAL :" at 54.204,97.388 h3
  text "X  SOLDERMASK" at 79.704,97.388 h3
  text "NON-CONDUCTIVE EPOXY." at 104.954,97.388 h3
  text "TRACKS : 0.21mm           / GAPS : 0.21mm" at 163.242,96.118 h3
  text "H.   STACK-UP :" at 15.704,94.388 h3
  text "SEE LAYER STACK-UP SEQUENCE FOR OVERALL THICKNESS." at 54.204,94.388 h3
  text "Layer" at 91.509,80.357 h3
  text "Name" at 104.066,80.357 h3
  text "Material" at 128.353,80.357 h3
  text "Thickness" at 150.177,80.357 h3
  text "Constant" at 168.104,80.357 h3
  text "Board Layer Stack" at 184.695,80.357 h3
  text "Top Overlay" at 104.066,74.357 h3
  text "Top Solder" at 104.066,68.357 h3
  text "Solder Resist" at 128.353,68.357 h3
  text "0.015mm" at 150.177,68.357 h3
  text "3.5" at 168.104,68.357 h3
  text "1" at 91.509,62.357 h3
  text "Top Layer" at 104.066,62.357 h3
  text "Copper" at 128.353,62.357 h3
  text "0.035mm" at 150.177,62.357 h3
  text "Dielectric 1" at 104.066,56.357 h3
  text "FR-4" at 128.353,56.357 h3
  text "1.500mm" at 150.177,56.357 h3
  text "4.2" at 168.104,56.357 h3
  text "2" at 91.506,50.357 h3
  text "Bottom Layer" at 104.066,50.357 h3
  text "Copper" at 128.353,50.357 h3
  text "0.035mm" at 150.177,50.357 h3
  text "Bottom Solder" at 104.066,44.357 h3
  text "Solder Resist" at 128.353,44.357 h3
  text "0.015mm" at 150.177,44.357 h3
  text "3.5" at 168.104,44.357 h3
  text "Bottom Overlay" at 104.066,38.357 h3
  text "Symbol" at 92.427,27.901 h3.6
  text "Count" at 106.532,27.901 h3.6
  text "Hole Size" at 121.192,27.901 h3.6
  text "Plated" at 150.085,27.901 h3.6
  text "Hole Type" at 162.467,27.901 h3.6
  text "Drill Layer Pair" at 180.494,27.901 h3.6
  text "Via/Pad" at 214.648,27.901 h3.6
  text "Pad Shape" at 229.419,27.901 h3.6
  text "Template" at 248.715,27.901 h3.6
  text "Hole Length" at 285.293,27.901 h3.6
  text "Routed Path Length" at 317.174,27.901 h3.6
  text "1" at 106.532,21.689 h3
  text "0.300mm (11.81mil)" at 121.192,21.689 h3
  text "PTH" at 150.085,21.689 h3
  text "Round" at 162.467,21.689 h3
  text "Top Layer - Bottom Layer" at 180.494,21.689 h3
  text "Via" at 214.648,21.689 h3
  text "Rounded" at 229.419,21.689 h3
  text "v80h30m0mx0" at 248.715,21.689 h3
  text "-" at 285.293,21.689 h3
  text "-" at 317.174,21.689 h3
  text "1" at 106.532,15.478 h3
  text "0.800mm (31.50mil)" at 121.192,15.478 h3
  text "NPTH" at 150.085,15.478 h3
  text "Round" at 162.467,15.478 h3
  text "Top Layer - Bottom Layer" at 180.494,15.478 h3
  text "Pad" at 214.648,15.478 h3
  text "Rounded" at 229.419,15.478 h3
  text "c0hn80m85p1000" at 248.715,15.478 h3
  text "-" at 285.293,15.478 h3
  text "-" at 317.174,15.478 h3
  text "1" at 106.532,9.266 h3
  text "1.100mm (43.31mil)" at 121.192,9.266 h3
  text "NPTH" at 150.085,9.266 h3
  text "Round" at 162.467,9.266 h3
  text "Top Layer - Bottom Layer" at 180.494,9.266 h3
  text "Pad" at 214.648,9.266 h3
  text "Rounded" at 229.419,9.266 h3
  text "c0hn110m115p1000" at 248.715,9.266 h3
  text "-" at 285.293,9.266 h3
  text "-" at 317.174,9.266 h3
  text "1" at 106.532,3.054 h3
  text "3.000mm (118.11mil)" at 121.192,3.054 h3
  text "NPTH" at 150.085,3.054 h3
  text "Slot" at 162.467,3.054 h3
  text "Top Layer - Bottom Layer" at 180.494,3.054 h3
  text "Pad" at 214.648,3.054 h3
  text "Rounded" at 229.419,3.054 h3
  text "r3000_300hn300_3000r100" at 248.715,3.054 h3
  text "30.000mm (1181.10mil)" at 285.293,3.054 h3
  text "27.000mm (1062.99mil)" at 317.174,3.054 h3
  text "2" at 106.532,-3.158 h3
  text "1.200mm (47.24mil)" at 121.192,-3.158 h3
  text "NPTH" at 150.085,-3.158 h3
  text "Round" at 162.467,-3.158 h3
  text "Top Layer - Bottom Layer" at 180.494,-3.158 h3
  text "Pad" at 214.648,-3.158 h3
  text "Rounded" at 229.419,-3.158 h3
  text "c0hn120m125" at 248.715,-3.158 h3
  text "-" at 285.293,-3.158 h3
  text "-" at 317.174,-3.158 h3
  text "76" at 106.532,-9.369 h3
  text "1.100mm (43.31mil)" at 121.192,-9.369 h3
  text "PTH" at 150.085,-9.369 h3
  text "Round" at 162.467,-9.369 h3
  text "Top Layer - Bottom Layer" at 180.494,-9.369 h3
  text "Pad" at 214.648,-9.369 h3
  text "Rounded" at 229.419,-9.369 h3
  text "(Mixed)" at 248.715,-9.369 h3
  text "-" at 285.293,-9.369 h3
  text "-" at 317.174,-9.369 h3
  text "123" at 106.532,-15.581 h3
  text "0.400mm (15.75mil)" at 121.192,-15.581 h3
  text "PTH" at 150.085,-15.581 h3
  text "Round" at 162.467,-15.581 h3
  text "Top Layer - Bottom Layer" at 180.494,-15.581 h3
  text "Via" at 214.648,-15.581 h3
  text "Rounded" at 229.419,-15.581 h3
  text "v80h40m0mx0" at 248.715,-15.581 h3
  text "-" at 285.293,-15.581 h3
  text "-" at 317.174,-15.581 h3
  text "205 Total" at 106.532,-21.793 h3
  text "Slot definitions :" at 92.427,-26.141 h3
  text "Routed Path Length" at 112.897,-26.141 h3
  text "= Calculated from tool start centre position to tool end centre position." at 138.256,-26.141 h3
  text "Hole Length" at 112.897,-28.626 h3
  text "= Routed Path Length + Tool Size = Slot length as defined in the PCB layout" at 128.842,-28.626 h3
  text ".Layer_Name" at 14.198,-54.044 h3
  text ".DRL" at 55.893,-54.044 h3
M20-Top Title Box:
  circle w0.254: c92.202,-60.764 r1.3
  region: 77.724,-61.857 66.968,-61.857 67.961,-59.365 75.819,-59.365 76.268,-58.605 78.476,-61.154
  region: 91.727,-53.528 76.2,-53.528 75.506,-55.303 74.295,-56.528 72.898,-54.668 72.898,-53.017 74.041,-51.62 75.477,-51.242 91.727,-51.242
  lines w0.254: 67.961,-59.365 76.753,-59.365 73.687,-55.827 cw(c75.491,-53.883) 75.731,-51.242 92.495,-51.242 91.733,-53.528 ; 71.275,-50.995 cw(c73.701,-51.965) 73.938,-49.363 ; 71.314,-50.962 66.968,-61.857 86.291,-61.857 ccw(c86.539,-59.123) 89.089,-60.143 ; 73.054,-54.897 78.476,-61.154 ; 73.308,-54.897 78.613,-61.018 ; 73.308,-54.643 78.613,-60.764 ; 73.406,-53.528 86.399,-53.528 ; 73.435,-54.516 78.74,-60.637 ; 73.562,-54.389 78.867,-60.51 ; 73.689,-54.262 78.994,-60.383 ; 73.816,-54.135 79.121,-60.256 ; 73.871,-52.183 79.176,-58.304 ; 73.939,-49.363 93.389,-49.363 89.089,-60.14 ; 73.943,-54.008 79.194,-60.066 ; 73.943,-53.754 79.248,-59.875 ; 73.943,-53.5 79.248,-59.621 ; 73.943,-52.611 79.248,-58.732 ; 74.07,-53.373 79.375,-59.494 ; 74.07,-52.992 79.375,-59.113 ; 75.442,-59.378 ccw(c75.547,-58.843) 75.844,-58.386 ; 76.528,-53.514 ccw(c76.502,-54.082) 76.172,-54.544 78.537,-57.273 cw(c76.733,-59.216) 77.466,-61.765 ; 82.81,-61.653 85.699,-53.274 ; 83.032,-61.603 85.901,-53.283 ; 83.159,-61.603 86.028,-53.283 ; 83.413,-61.603 86.282,-53.283 ; 83.667,-61.603 86.536,-53.283 ; 83.921,-61.603 86.79,-53.283 ; 84.175,-61.603 87.044,-53.283 ; 84.429,-61.603 87.298,-53.283 ; 84.683,-61.603 87.552,-53.283 ; 84.937,-61.603 87.806,-53.283 ; 85.145,-61.653 88.035,-53.274 ; 88.035,-53.528 91.727,-53.528 ; 91.059,-53.525 91.821,-51.239 ; 91.225,-53.528 91.987,-51.242 ; 91.479,-53.528 92.241,-51.242
  lines w0.3: 5.198,-65.744 95.198,-65.744 95.198,-45.744 5.198,-45.744 ; 5.198,-60.744 65.198,-60.744 ; 5.198,-55.744 65.198,-55.744 ; 5.198,-50.744 65.198,-50.744 ; 5.198,-65.744 5.198,-45.744 ; 45.198,-65.744 45.198,-50.744 ; 65.198,-65.744 65.198,-45.744 ; 82.81,-61.653 85.145,-61.653
  text "Project: '.Board_Name'" at 6.198,-48.96 h3
  text "Layer:" at 6.198,-54.044 h3
  text "Gerber:" at 46.187,-54.044 h3
  text "Variant: '.VariantName'" at 6.198,-59.044 h3
  text "Ref: '.Board_Reference'" at 46.314,-59.044 h3
  text "R" at 91.694,-61.526 h1.52
  text "Date: '.Board_Document_Date'" at 6.198,-64.044 h3
  text "Rev: '.Board_PCB_Revision'" at 46.257,-64.044 h3
M21-Bottom Title Box:
  circle w0.254: c8.381,-60.764 r1.3
  region: 8.855,-53.528 24.383,-53.528 25.077,-55.303 26.288,-56.528 27.685,-54.668 27.685,-53.017 26.542,-51.62 25.106,-51.242 8.855,-51.242
  region: 22.859,-61.857 33.615,-61.857 32.621,-59.365 24.764,-59.365 24.315,-58.605 22.106,-61.154
  lines w0.254: 8.342,-51.242 9.104,-53.528 ; 8.596,-51.242 9.358,-53.528 ; 8.762,-51.239 9.524,-53.525 ; 8.85,-53.528 8.088,-51.242 24.852,-51.242 cw(c25.092,-53.883) 26.895,-55.827 23.829,-59.365 32.621,-59.365 ; 8.855,-53.528 12.548,-53.528 ; 11.493,-60.14 7.194,-49.363 26.643,-49.363 ; 11.494,-60.143 ccw(c14.043,-59.123) 14.292,-61.857 33.615,-61.857 29.268,-50.962 ; 12.548,-53.274 15.437,-61.653 ; 12.776,-53.283 15.646,-61.603 ; 13.03,-53.283 15.9,-61.603 ; 13.284,-53.283 16.154,-61.603 ; 13.538,-53.283 16.408,-61.603 ; 13.792,-53.283 16.662,-61.603 ; 14.046,-53.283 16.916,-61.603 ; 14.184,-53.528 27.177,-53.528 ; 14.3,-53.283 17.17,-61.603 ; 14.554,-53.283 17.424,-61.603 ; 14.681,-53.283 17.551,-61.603 ; 14.884,-53.274 17.773,-61.653 ; 21.208,-59.494 26.513,-53.373 ; 21.208,-59.113 26.513,-52.992 ; 21.335,-59.875 26.64,-53.754 ; 21.335,-59.621 26.64,-53.5 ; 21.335,-58.732 26.64,-52.611 ; 21.389,-60.066 26.64,-54.008 ; 21.407,-58.304 26.712,-52.183 ; 21.462,-60.256 26.767,-54.135 ; 21.589,-60.383 26.894,-54.262 ; 21.716,-60.51 27.021,-54.389 ; 21.843,-60.637 27.148,-54.516 ; 21.97,-61.018 27.275,-54.897 ; 21.97,-60.764 27.275,-54.643 ; 22.106,-61.154 27.529,-54.897 ; 23.117,-61.765 cw(c23.849,-59.216) 22.046,-57.273 24.411,-54.544 ccw(c24.08,-54.082) 24.054,-53.514 ; 24.738,-58.386 ccw(c25.036,-58.843) 25.141,-59.378 ; 26.645,-49.363 cw(c26.881,-51.965) 29.307,-50.995
  lines w0.3: 15.437,-61.653 17.773,-61.653 ; 35.198,-65.744 35.198,-45.744 ; 35.198,-60.744 95.198,-60.744 ; 35.198,-55.744 95.198,-55.744 ; 35.198,-50.744 95.198,-50.744 ; 55.198,-65.744 55.198,-50.744 ; 5.198,-65.744 5.198,-45.744 95.198,-45.744 95.198,-65.744 5.198,-65.744
  text "Project: '.Board_Name'" at 94.004,-48.96 h3
  text "Gerber:" at 54.015,-54.044 h3
  text "Layer:" at 94.003,-54.044 h3
  text "Ref: '.Board_Reference'" at 54.015,-59.044 h3
  text "Variant: '.VariantName'" at 94.004,-59.044 h3
  text "R" at 8.889,-61.526 h1.52
  text "Rev: '.Board_PCB_Revision'" at 54.072,-64.044 h3
  text "Date: '.Board_Document_Date'" at 94.004,-64.044 h3

## Dimensions
14.353,-2.1 to 84.453,-0.9 on M2-Board Dimensions
12.253,74.7 to 13.753,-0.2 on M2-Board Dimensions
28.853,74.7 to 69.953,74.7 on M2-Board Dimensions
69.953,74.7 to 84.457,74.7 on M2-Board Dimensions
69.953,74.7 to 67.943,64.794 on M2-Board Dimensions
14.353,74.7 to 28.853,74.7 on M2-Board Dimensions
14.353,1.77 to 49.353,3.3 on M2-Board Dimensions

## Text inside footprints (layer, text, board x,y; h text height)
B1: M14-Top Assembly "6" at 80.799,10.799 h1.5 r45; M14-Top Assembly "5" at 79.809,11.789 h1.5 r45; M14-Top Assembly "4" at 78.801,12.762 h1.5 r45; M14-Top Assembly "3" at 76.273,6.274 h1.5 r45; M14-Top Assembly "2" at 75.283,7.264 h1.5 r45; M14-Top Assembly "1" at 74.382,8.307 h1.5 r45; M14-Top Assembly "8" at 80.869,7.193 h1.5 r135; M14-Top Assembly "7" at 75.018,13.115 h1.5 r135; Top Overlay "1" at 73.586,7.511 h1.5 r45
CN1: M15-Bottom Assembly "1" at 60.457,33.755 h1; M15-Bottom Assembly "45" at 38.807,33.755 h1; Bottom Overlay "1" at 60.982,34.78 h1.5; Bottom Overlay "45" at 38.032,34.78 h1.5
CN2: M15-Bottom Assembly "37" at 17.189,20.919 h1.5 r270; M15-Bottom Assembly "38" at 19.729,20.932 h1.5 r270; M15-Bottom Assembly "2" at 19.712,67.004 h1.5 r270; M15-Bottom Assembly "1" at 17.172,67.156 h1.5 r270; Bottom Overlay "1" at 16.153,66.9 h1.5
CN3: M15-Bottom Assembly "1" at 78.132,67.156 h1.5 r270; M15-Bottom Assembly "2" at 80.672,67.004 h1.5 r270; M15-Bottom Assembly "38" at 80.689,20.932 h1.5 r270; M15-Bottom Assembly "37" at 78.149,20.919 h1.5 r270; Bottom Overlay "1" at 77.053,66.8 h1.5
LCD1: M14-Top Assembly "6 o'clocck" at 38.816,28.37 h3; M14-Top Assembly "THE ESD" at 49.266,-12.102 h1.5; M14-Top Assembly "2.2\" TFT" at 44.316,47.87 h3; M14-Top Assembly "AREA" at 44.716,0.333 h1.5; M14-Top Assembly "CIRCUIT" at 49.266,-13.852 h1.5; M14-Top Assembly "240 * RGB * 320" at 38.816,43.87 h3; M14-Top Assembly "ADD" at 52.516,-10.335 h1.5; M14-Top Assembly "BENDING" at 46.376,2.1 h1.5; M14-Top Assembly "DISPLAYTECH" at 44.766,-20.085 h1.5; M14-Top Assembly "STIFFENER PI" at 44.866,-25.185 h1.5; M14-Top Assembly "45" at 37.816,-28.26 h1.5; M14-Top Assembly "1" at 60.141,-28.31 h1.5; Top Overlay "240 * RGB * 320" at 38.853,42.3 h3; Top Overlay "ADD" at 52.516,-10.335 h1.5; Top Overlay "THE ESD" at 49.266,-12.102 h1.5; Top Overlay "6 o'clocck" at 38.816,28.37 h3; Top Overlay "BENDING" at 46.376,2.1 h1.5; Top Overlay "CIRCUIT" at 49.266,-13.852 h1.5; Top Overlay "2.2\" TFT" at 44.316,47.87 h3; Top Overlay "AREA" at 44.716,0.333 h1.5; Top Overlay "1" at 60.066,-25.13 h1.5; Top Overlay "1" at 61.066,-28.38 h1.5; Top Overlay "45" at 38.066,-25.13 h1.5; Top Overlay "STIFFENER PI" at 44.866,-25.185 h1.5; Top Overlay "DISPLAYTECH" at 44.766,-20.085 h1.5
U1: M15-Bottom Assembly "1" at 53.562,53.217 h1.5 r90; M15-Bottom Assembly "4" at 53.562,49.542 h1.5 r90; M15-Bottom Assembly "5" at 46.452,49.517 h1.5 r90; M15-Bottom Assembly "8" at 46.452,53.342 h1.5 r90; Bottom Overlay "1" at 53.553,54.1 h1.5 r90